# EAGLE board MovuinoHealthBandV0.2.5-panel (EAGLE 9.5.2)
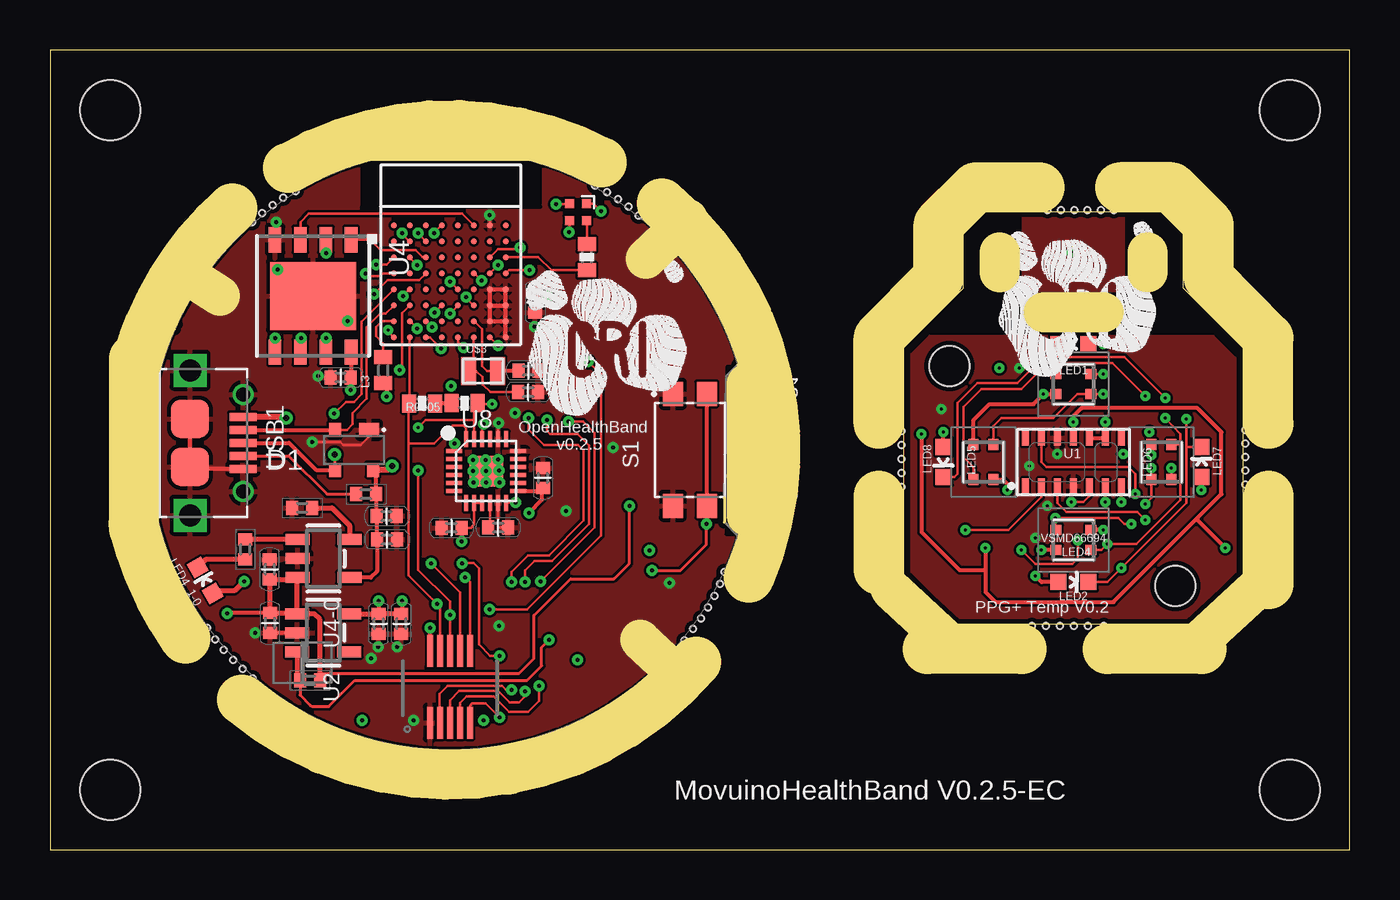
[diagram p0: board, top side]
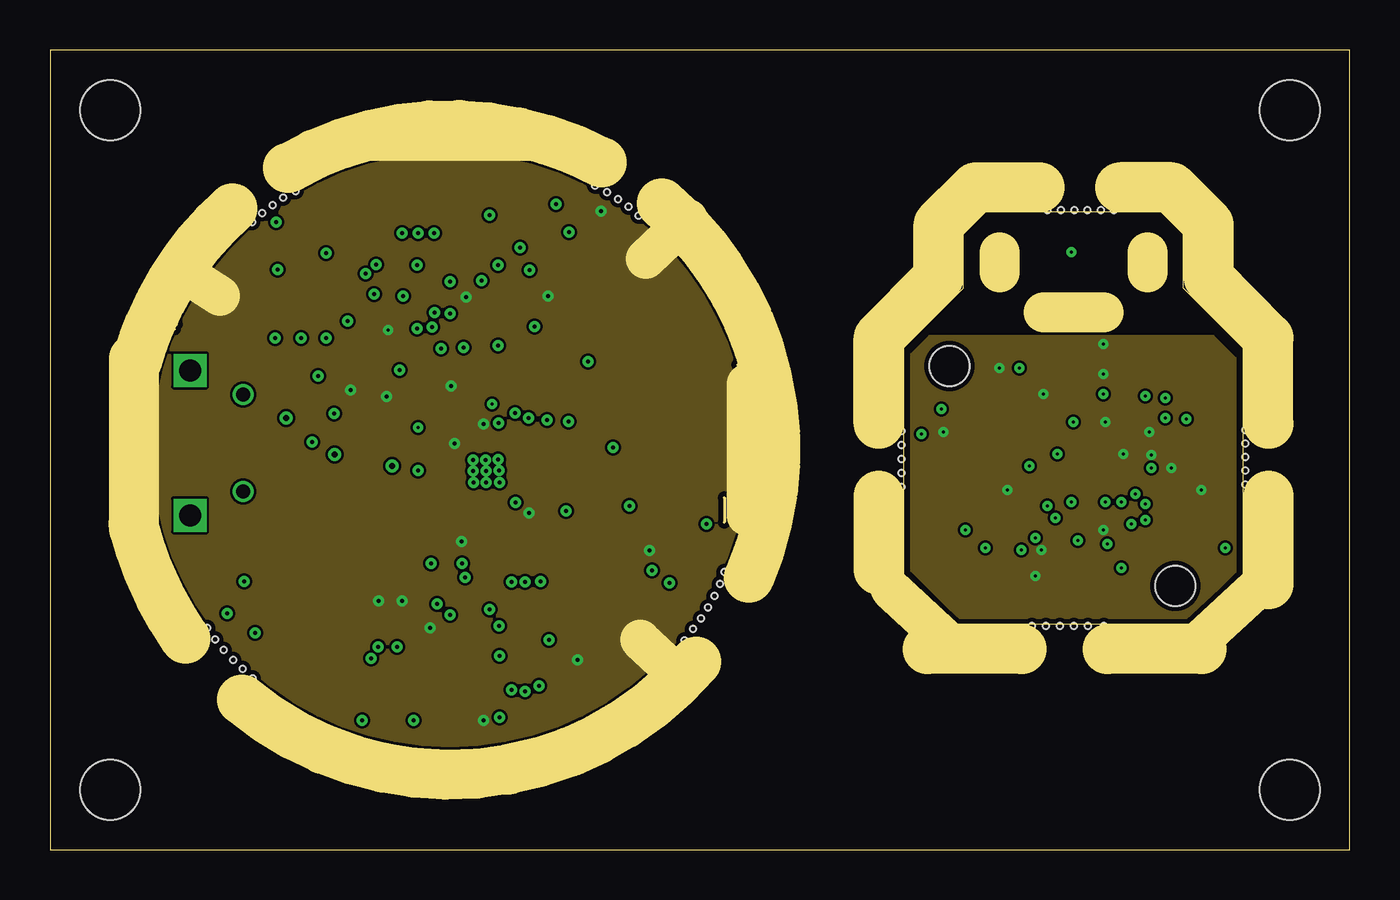
[diagram p1: board, inner layer VCC]
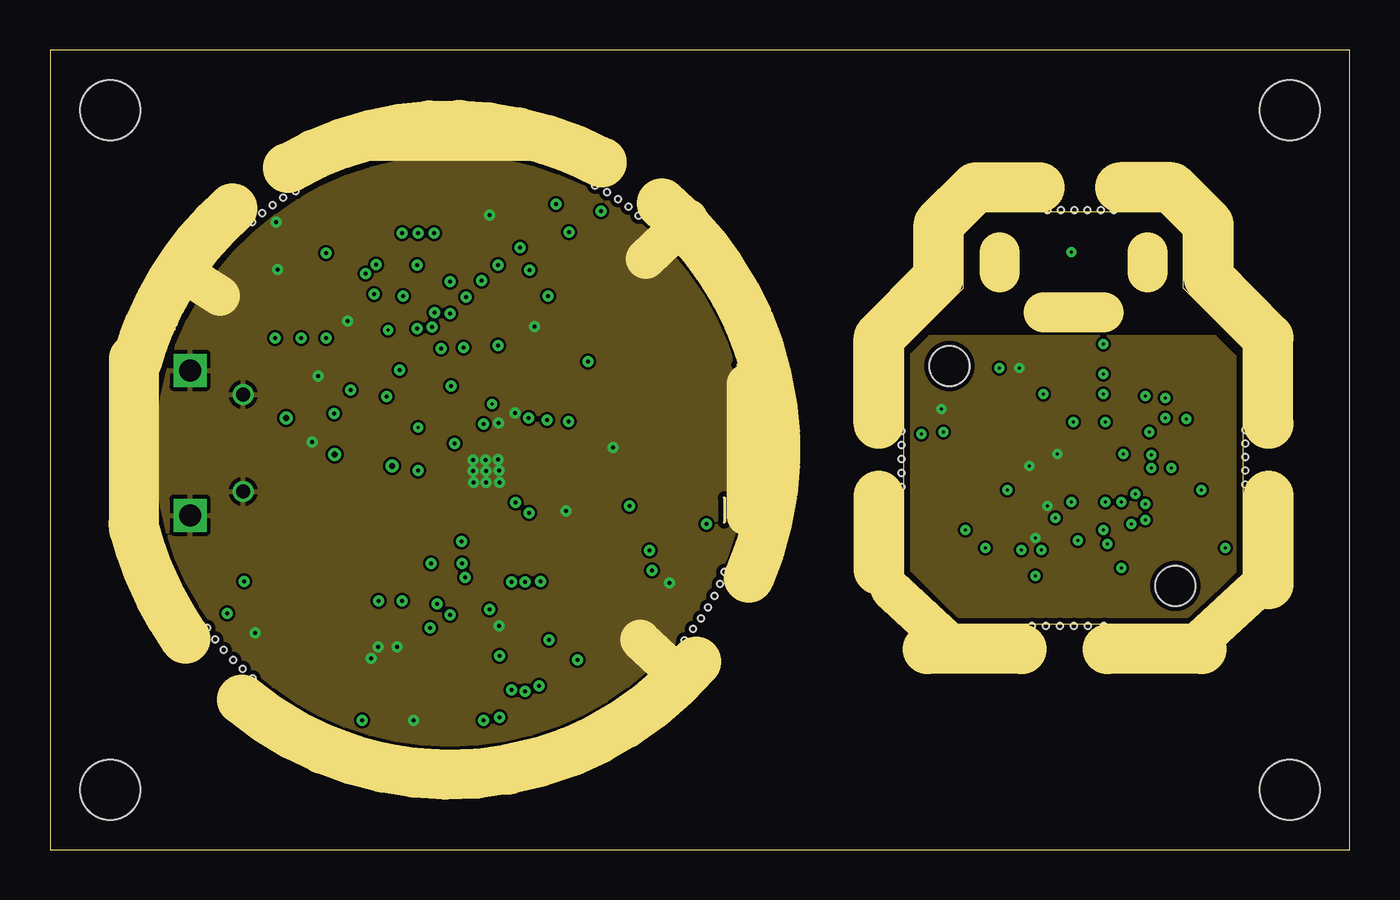
[diagram p2: board, inner layer GND2-EC]
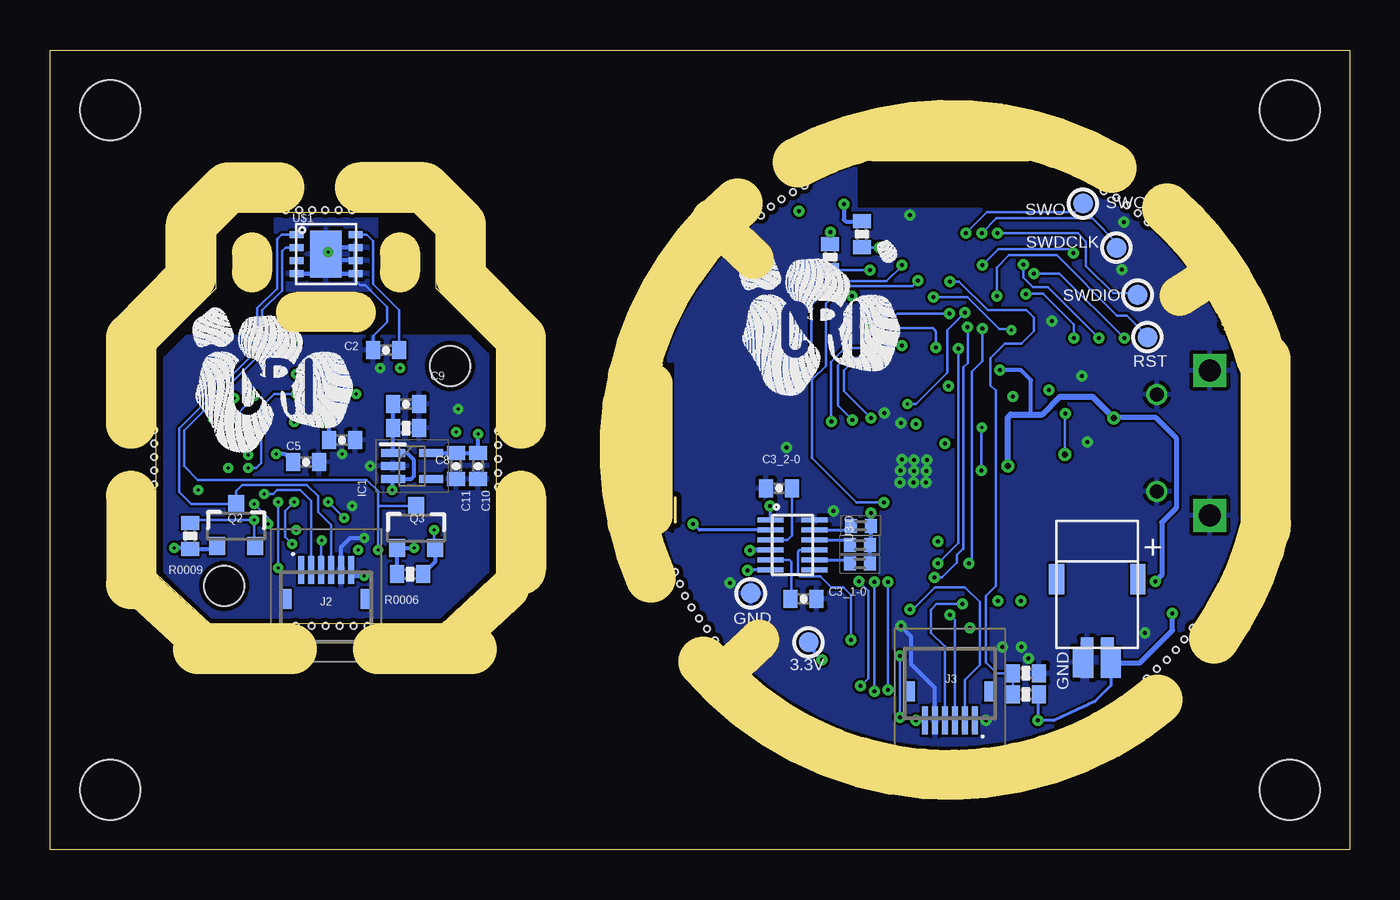
[diagram p3: board, bottom side, seen from below]

Size 65 x 40 mm. Coordinates in mm from the lower left corner, seen from the top.
Outline: 6.25,26.03 6.22,26.06
Outline: 6.33,26.25 6.36,26.28
Outline: 33.73,17.61 33.73,16.38
Outline: 34.39,24.24 34.39,24.25
Outline: 0,0 65,0 65,40 0,40 0,0
Outline: 55.59,31.88 46.79,31.88 45.69,30.78 45.69,28.08 42.69,25.08 42.69,13.78 45.39,11.28 56.99,11.28 59.69,13.78 59.69,25.08 56.69,28.08 56.69,30.78 55.59,31.88
Copper layers (1+2*3+16): Top 0.018mm / dielectric 0.36mm / VCC 0.035mm / dielectric 0.71mm / GND2-EC 0.035mm / dielectric 0.36mm / Bottom 0.018mm
Design rules "eC_4Layer_PClass7_BaseCopperO18-I35 *": minimum track width 0.125mm, minimum drill 0.15mm, track to track 0.125mm, track to pad 0.125mm, pad to pad 0.125mm, via to via 0.125mm, smd to smd 0mil, copper to edge 0.25mm, drill to drill 0.35mm, minimum pad ring 0.175mm, minimum via ring 0.175mm, stop-mask expansion 0mil, vias tented up to drill 0.45mm, thermal gap 0.2mm
Net classes: 1 power: width 0.254 mm; 2 pcbway_cheap: width 0.152 mm, drill 0.3 mm, clearance 0.152 mm; 3 pcbway_5mil: width 0.127 mm, drill 0.25 mm, clearance 0.127 mm; 4 pcbway_4mil: width 0.102 mm, drill 0.2 mm, clearance 0.102 mm; 5 Eurocircuits-Classe7-drill0.15: width 0.125 mm, drill 0.15 mm, clearance 0.125 mm
Holes 2 mm at 44.99,24.18 56.29,13.18
Holes 0.3 mm at 10.1,31.39 10.6,31.85 11.13,32.24 11.67,32.61 12.28,32.93 7.85,11.08 8.26,10.51 8.69,10 9.15,9.5 9.63,9.03 10.13,8.57 31.74,10.47 32.15,11.03 32.55,11.57 32.91,12.12 33.23,12.69 33.5,13.29 33.74,13.9 27.27,33.21 27.85,32.89 28.41,32.55 28.94,32.17 29.44,31.72 30.4,30.9 53.2,31.98 52.55,31.98 51.88,31.98 51.23,31.98 50.56,31.98 49.88,31.98 59.79,20.98 59.79,20.31 59.79,19.63 59.79,18.97 59.79,18.26 52.71,11.18 51.91,11.18 51.21,11.18 50.51,11.18 49.81,11.18 49.11,11.18 42.59,20.93 42.59,20.23 42.59,19.53 42.59,18.83 42.59,18.13
Holes 3 mm at 3,37 62,37 62,3 3,3
tRestrict: area 15.6,32.2 to 24.5,35.8; area 3.8,16.7 to 5.5,24; area 33.8,16.8 to 35.6,24.2; area 33.8,15.8 to 35.5,23.1
bRestrict: area 15.6,32.2 to 24.5,35.8; area 3.8,16.7 to 5.5,24; area 33.9,15.9 to 35.6,24.3
Milling: 31 lines

## Footprints (pad centres in the part's own frame; a part is rotated, then mirrored left to right if it is on the bottom)
TESTPOINT_ROUND_1MM = smd 1 x 1: P$1 0,0
0402-CAP = smd 0.7 x 0.9: 1 -0.65,0; 2 0.65,0
0402-CAP-SMALL-TDOCU = smd 0.6 x 0.7: 1 -0.5,0; 2 0.5,0
0402-RES = smd 0.7 x 0.9: 1 -0.65,0; 2 0.65,0
SOT143B = smd 1 x 0.7: 1 -0.75,-1 | smd 0.6 x 0.7: 2 0.95,-1; 3 0.95,1; 4 -0.95,1
SOT65P210X110-5N = smd 1.2 x 0.4: 1 -0.95,0.65; 2 -0.95,0; 3 -0.95,-0.65; 4 0.95,-0.65; 5 0.95,0.65
DF12-10-DP = smd 0.3 x 1.6: 1 -1,-1.8; 2 -1,1.8; 3 -0.5,-1.8; 4 -0.5,1.8; 5 0,-1.8; 6 0,1.8; 7 0.5,-1.8; 8 0.5,1.8; 9 1,-1.8; 10 1,1.8
59453061110EDHLF = smd 0.3 x 1.4: 1 -1.25,0.1; 2 -0.75,0.1; 3 -0.25,0.1; 4 0.25,0.1; 5 0.75,0.1; 6 1.25,0.1 | smd 0.52 x 1: MP1 -1.99,-1.35; MP2 1.99,-1.35
C0402 = smd 0.7 x 0.9: 1 -0.65,0; 2 0.65,0
VSMD66694 = smd 0.55 x 0.5: 1 -0.875,0.5; 2 -0.875,-0.5; 3 0.875,-0.5; 4 0.875,0.5
LED-0603 = smd 0.8 x 0.8: A 0,-0.75; C 0,0.75
PWR2P_1.0 = smd 2.032 x 0.635: + 0.508,0.508; - 0.508,-0.508 | smd 1.524 x 0.762: P$3 -3.429,2.032; P$4 -3.429,-2.032
SOT23-3 = smd 0.8 x 0.9: 1 -0.95,-1; 2 0.95,-1; 3 0,1.1
R0402-SMALL-TDOCU = smd 0.6 x 0.7: 1 -0.5,0; 2 0.5,0
434331045822 = smd 1.2 x 1: 1 2.8,0.85; 2 2.8,-0.85; 3 -2.8,0.85; 4 -2.8,-0.85
PAD-1X1.5_NOSILK = smd 1 x 1.5: P$1 0,0
OLGA-14 = smd 0.75 x 0.35: 1 -1.2,2.4; 2 -1.2,1.6; 3 -1.2,0.8; 4 -1.2,0; 5 -1.2,-0.8; 6 -1.2,-1.6; 7 -1.2,-2.4; 8 1.2,-2.4; 9 1.2,-1.6; 10 1.2,-0.8; 11 1.2,0; 12 1.2,0.8; 13 1.2,1.6; 14 1.2,2.4
SOT23-5 = smd 0.55 x 1.2: 1 -0.95,-1.3; 2 0,-1.3; 3 0.95,-1.3; 4 0.95,1.3; 5 -0.95,1.3
BC840 = smd 0.305 x 0.305: A0 -2.79,2.816; A1 -2.79,2.003; A2 -2.79,1.216; A3 -2.79,0.403; A4 -2.79,-0.385; A5 -2.79,-1.197; A6 -2.79,-1.985; A7 -2.79,-2.798; B0 -2.002,2.816; B1 -2.002,2.003; B2 -2.002,1.216; B3 -2.002,0.403; B4 -2.002,-0.385; B5 -2.002,-1.197; B6 -2.002,-1.985; B7 -2.002,-2.798; C0 -1.189,2.816; C1 -1.189,2.003; C2 -1.189,1.216; C3 -1.189,0.403; C4 -1.189,-0.385; C5 -1.189,-1.197; C6 -1.189,-1.985; C7 -1.189,-2.798; D0 -0.402,2.816; D1 -0.402,2.003; D2 -0.402,1.216; D3 -0.402,0.403; D4 -0.402,-0.385; D5 -0.402,-1.197; D6 -0.402,-1.985; D7 -0.402,-2.798; E0 0.411,2.816; E1 0.411,2.003; E2 0.411,1.216; E3 0.411,0.403; E4 0.411,-0.385; E5 0.411,-1.197; E6 0.411,-1.985; E7 0.411,-2.798; F0 1.198,2.816; F1 1.198,2.003; F2 1.198,1.216; F3 1.198,0.403; F4 1.198,-0.385; F5 1.198,-1.197; F6 1.198,-1.985; F7 1.198,-2.798; G0 2.011,2.816; G1 2.011,2.003; G2 2.011,1.216; G3 2.011,0.403; G4 2.011,-0.385; G5 2.011,-1.197; G6 2.011,-1.985; G7 2.011,-2.798; H0 2.798,2.816; H1 2.798,2.003; H2 2.798,1.216; H3 2.798,0.403; H4 2.798,-0.385; H5 2.798,-1.197; H6 2.798,-1.985; H7 2.798,-2.798
TDFN12 = smd 0.25 x 1.3: 1 -1.25,-1.1; 2 -0.75,-1.1; 3 -0.25,-1.1; 4 0.25,-1.1; 5 0.75,-1.1; 6 1.25,-1.1; 7 1.25,1.1; 8 0.75,1.1; 9 0.25,1.1; 10 -0.25,1.1; 11 -0.75,1.1; 12 -1.25,1.1
WSON8 = smd 0.635 x 1.27: 1 -1.905,-2.81; 2 -0.635,-2.81; 3 0.635,-2.81; 4 1.905,-2.81; 5 1.905,2.81; 6 0.635,2.81; 7 -0.635,2.81; 8 -1.905,2.81 | smd 4.3 x 3.4: 9 0,0
LEAD-QFN24 = smd 0.8 x 0.2: 1 -1.6,1; 2 -1.6,0.6; 3 -1.6,0.2; 4 -1.6,-0.2; 5 -1.6,-0.6; 6 -1.6,-1; 13 1.6,-1; 14 1.6,-0.6; 15 1.6,-0.2; 16 1.6,0.2; 17 1.6,0.6; 18 1.6,1 | smd 0.2 x 0.8: 7 -1,-1.6; 8 -0.6,-1.6; 9 -0.2,-1.6; 10 0.2,-1.6; 11 0.6,-1.6; 12 1,-1.6; 19 1,1.6; 20 0.6,1.6; 21 0.2,1.6; 22 -0.2,1.6; 23 -0.6,1.6; 24 -1,1.6 | smd 1.7 x 1.54: 25 0,0; 26 0,0
TDFN-08 = smd 0.7 x 0.35: 1 -1.475,0.975; 2 -1.475,0.325; 3 -1.475,-0.325; 4 -1.475,-0.975; 5 1.475,-0.975; 6 1.475,-0.325; 7 1.475,0.325; 8 1.475,0.975 | smd 1.58 x 2.35: EXP 0,0
CRYSTAL-SMD-2X1.2-ABS06 = smd 0.75 x 1.4: P$1 -0.725,0; P$2 0.725,0
LRTB_R48G = smd 0.45 x 0.45: 1 0.425,0.425; 2 0.425,-0.425; 3 -0.425,-0.425; 4 -0.425,0.425
MICRO-USB5+6P-SMD-0.65-AB-TB = smd 0.4 x 1.35: 1 -1.3,2.65; 2 -0.65,2.65; 3 0,2.65; 4 0.65,2.65; 5 1.3,2.65 | smd 1.9 x 1.9: P1 -1.2,0; P2 1.2,0 | drill 0.7: P5 -2.425,2.65; P6 2.425,2.65 | drill 1.1 square: P$3 -3.625,0; P$4 3.625,0

## Placement (x,y rotation side)
3.3V  [TESTPOINT_ROUND_1MM]  27.06,10.37 0 bottom
C2  1uF  [0402-CAP]  48.19,24.98 0 bottom
C2_1  10uF  [0402-CAP-SMALL-TDOCU]  11.01,11.33 270 top
C2_2  10uF  [0402-CAP-SMALL-TDOCU]  17.57,11.3 270 top
C2_3  1uF  [0402-CAP-SMALL-TDOCU]  16.44,11.3 270 top
C2_4  10uF  [0402-CAP-SMALL-TDOCU]  16.85,15.51 0 top
C3_1-0  470nF  [0402-CAP]  27.31,12.54 0 bottom
C3_2-0  1uF  [0402-CAP]  28.53,18.07 180 bottom
C4_1  10uF  [0402-CAP-SMALL-TDOCU]  10.99,14.02 270 top
C5  1uF  [0402-CAP]  52.19,19.38 0 bottom
C6  1uF  [0402-CAP]  50.39,20.48 180 bottom
C6_1  0.1uF  [0402-CAP-SMALL-TDOCU]  14.54,23.62 180 top
C6_2  0.1uF  [0402-CAP-SMALL-TDOCU]  16.84,16.68 0 top
C6_3  12pF  [0402-CAP-SMALL-TDOCU]  23.93,23.96 0 top
C6_4  12pF  [0402-CAP-SMALL-TDOCU]  23.92,22.88 0 top
C6_5  10uF  [0402-CAP-SMALL-TDOCU]  24.27,27.37 90 top
C8  10uF  [0402-RES]  47.19,21.08 180 bottom
C8_1  0.1uF  [0402-CAP-SMALL-TDOCU]  24.66,18.59 90 top
C8_2  0.1uF  [0402-CAP-SMALL-TDOCU]  22.42,16.11 0 top
C8_3  0.01uF  [0402-CAP-SMALL-TDOCU]  20.08,16.1 180 top
C9  0.1uF  [0402-CAP]  47.19,22.28 0 bottom
C10  0.1uF  [0402-CAP]  43.59,19.18 270 bottom
C11  4.7uF  [0402-CAP]  44.69,19.18 270 bottom
D1  PRTR5V0U2X,215  [SOT143B]  15.2,20 180 top
GND2  [TESTPOINT_ROUND_1MM]  29.95,12.82 0 bottom
IC1  TLV70018DCKR  [SOT65P210X110-5N]  46.89,19.18 0 bottom
J1  DF12-10-F  [DF12-10-DP]  20,8.14 0 top
J2  59453-061110EDHLF  [59453061110EDHLF]  51.19,13.88 0 bottom
J3  59453-061110EDHLF  [59453061110EDHLF]  20,6.56 180 bottom
L3  10uH  [C0402]  16.67,23.98 90 top
LED1  VSMD66694  [VSMD66694]  51.19,23.28 0 top
LED2  VSMD66694  [VSMD66694]  51.19,15.48 180 top
LED3  [LED-0603]  51.19,25.28 90 top
LED4  [LED-0603]  51.19,13.38 270 top
LED4_1-0  Power  [LED-0603]  7.76,13.46 30 top
LED5  VSMD66694  [VSMD66694]  46.69,19.38 90 top
LED6  VSMD66694  [VSMD66694]  55.59,19.38 270 top
LED7  [LED-0603]  57.59,19.38 0 top
LED8  [LED-0603]  44.69,19.38 180 top
PWR1  PWR2P_1.0  [PWR2P_1.0]  12.62,10.1 270 bottom
Q2  200mA/50V  [SOT23-3]  55.69,16.18 0 bottom
Q3  200mA/50V  [SOT23-3]  46.69,16.08 0 bottom
R0001  10K  [0402-RES]  26.85,29.63 90 top
R0002  10K  [0402-RES]  25.98,29.63 90 bottom
R2_1  100K  [R0402-SMALL-TDOCU]  15.8,17.78 180 top
R2_2  100K  [R0402-SMALL-TDOCU]  13,8.46 0 top
R0003  10K  [0402-RES]  24.39,30.78 90 bottom
R3_2-0  10KR  [R0402-SMALL-TDOCU]  24.45,16.2 0 bottom
R3_3-0  10KR  [R0402-SMALL-TDOCU]  24.49,14.31 0 bottom
R3_10  10KR  [R0402-SMALL-TDOCU]  24.49,15.23 0 bottom
R0004  10K  [0402-RES]  18.62,22.32 0 top
R4-1-0  5KR  [R0402-SMALL-TDOCU]  12.61,17.09 180 top
R4_2  100kR  [0402-RES]  16.19,7.76 180 bottom
R4_2-0  120R  [R0402-SMALL-TDOCU]  9.77,15.01 90 top
R4_3  100kR  [0402-RES]  16.18,8.82 0 bottom
R0005  10K  [0402-RES]  20.73,22.33 180 top
R0006  4.7K  [0402-RES]  46.99,13.78 0 bottom
R0009  4.7K  [0402-RES]  57.99,15.68 90 bottom
RESET  [TESTPOINT_ROUND_1MM]  10.11,25.63 0 bottom
S1  [434331045822]  32,20 90 top
SWCLK  [TESTPOINT_ROUND_1MM]  11.66,30.11 0 bottom
SWIO  [TESTPOINT_ROUND_1MM]  10.6,27.75 0 bottom
SWO  [TESTPOINT_ROUND_1MM]  13.33,32.32 0 bottom
TP3  [PAD-1X1.5_NOSILK]  13.33,9.37 180 bottom
TP4  [PAD-1X1.5_NOSILK]  11.93,9.33 180 bottom
U1  MAX30105  [OLGA-14]  51.19,19.38 90 top
U2  AP2112-3.3  [SOT23-5]  13.67,10.85 270 top
U3  [BC840]  20,28.42 0 top
U3-0  STM6601  [TDFN12]  27.86,15.23 270 bottom
U4  W25Q16BVZP  [WSON8]  13.16,27.7 180 top
U4-0  MCP73831  [SOT23-5]  13.68,14.56 270 top
U8  [LEAD-QFN24]  21.82,18.93 0 top
U$1  MAX30205MTA+  [TDFN-08]  51.19,29.78 0 bottom
U$2  LOGO-CRI-NEW-110MM-BOTTOM-SILK  [LOGO_CRI-NEW-BMP10MM-BOTTOM]  26.32,26.23 0 top
U$3  32.768khz  [CRYSTAL-SMD-2X1.2-ABS06]  21.66,23.95 0 top
U$4  LOGO-CRI-NEW-110MM-BOTTOM-SILK  [LOGO_CRI-NEW-BMP10MM-BOTTOM]  51.49,27.18 0 bottom
U$5  LOGO-CRI-NEW-110MM-BOTTOM-SILK  [LOGO_CRI-NEW-BMP10MM-BOTTOM]  53.69,23.38 0 top
U$6  LOGO-CRI-NEW-110MM-BOTTOM-SILK  [LOGO_CRI-NEW-BMP10MM-BOTTOM]  28,25.23 0 bottom
U$24  LRTB_R48G  [LRTB_R48G]  26.4,31.89 0 top
USB1  [MICRO-USB5+6P-SMD-0.65-AB-TB]  7,20.34 270 top

## Library data of the parts
3.3V GND2 J2 J3 LED3 LED4 LED7 LED8 RESET SWCLK SWIO SWO TP3 TP4 U3-0 U4 U$3 USB1 = movuino
C2 C3_1-0 C3_2-0 C5 C6 = movuino; DIELECTRIC: MLCC, X5R; MF: Murata Electronics; MPN: GRM155R61A105KE15D; OC_MOUSER: 81-GRM155R61A105KE15; OC_RS: 7235199; TOLERANCE: 10%; VOLTAGE: 10V
C2_1-C2_4 C4_1 C6_1-C6_5 C8_1-C8_3 R2_1 R2_2 R3_2-0 R3_3-0 R3_10 R4-1-0 R4_2-0 = movuinoV0
C8 = movuino; MF: Murata Electronics; OC_MOUSER: 81-GRM155R60J106ME4D; OC_RS: 8467274; TOLERANCE: 20%; VOLTAGE: 6.3V
C9-C11 = movuino; DIELECTRIC: MLCC, X5R; MF: Murata Electronics; MPN: GRM155R61C104KA88D; OC_MOUSER: 81-GRM155R61C104KA8D; OC_RS: 7235200; TOLERANCE: 10%; VOLTAGE: 16V
D1 = movuino; AVAILABILITY: Unavailable; DESCRIPTION: PRTR5V0U2X Series 9 V 16 pF Rail-to-Rail ESD Protection Diode - SOT-143B; MF: Nexperia USA; MP: PRTR5V0U2X,215; PACKAGE: SOT-143 NXP Semiconductors; PRICE: None
IC1 = movuino; DESCRIPTION: 200-mA, Low-IQ, Low-Dropout Regulator for Portable Devices; HEIGHT: 1.1mm; MANUFACTURER_NAME: Texas Instruments; MANUFACTURER_PART_NUMBER: TLV70018DCKR; MOUSER_PART_NUMBER: 595-TLV70018DCKR; MOUSER_PRICE-STOCK: https://www.mouser.com/Search/Refine.aspx?Keyword=595-TLV70018DCKR
J1 = movuino; MF: Hirose; MPN: DF12E(3.0)-10DP-0.5V(81); OC_MOUSER: 798-DF12E3010DP05V81
L3 = SparkFun-Passives
LED1 LED2 LED5 LED6 = movuino; DESCRIPTION: Red + IR LED 660/940nm 60deg SMD 1206; HEIGHT: 0.97mm; MANUFACTURER_NAME: Vishay; MANUFACTURER_PART_NUMBER: VSMD66694; MOUSER_PART_NUMBER: 78-VSMD66694; MOUSER_PRICE-STOCK: https://www.mouser.com/Search/Refine.aspx?Keyword=78-VSMD66694
LED4_1-0 = movuino; COLOUR: Red; FORWARD_INTENSITY: 25ma; FORWARD_VOLTAGE: 2.5V; LUMINOUS_INTENSITY: 180mcd; MF: OSRAM Opto Semiconductors; MPN: LS Q976-NR-1; OC_MOUSER: 720-LSQ976-NR-1; OC_RS: 6545420
PWR1 = movuino; MF: JST; MPN: SM02B-SRSS-TB(LFSN); OC_RS: 5151490
Q2 Q3 = SparkFun-DiscreteSemi; PROD_ID: TRANS-00830
R0001-R0004 R4_2 R4_3 R0005 = movuino; MF: TE Connectivity; MPN: CRG0402F10K; OC_MOUSER: 279-CRG0402F10K; OC_RS: 6678848; POWER_RATING: 0.063W; TOLERANCE: 1%
R0006 R0009 = movuino; MF: TE Connectivity; MPN: CRG0402F4K7; OC_MOUSER: 279-CRG0402F4K7; OC_RS: 6678794; POWER_RATING: 0.063W; TOLERANCE: 1%
S1 = Wurth_Elektronik_Electromechanic_Switch_rev17c
U1 = movuino; PROD_ID: IC-13510
U2 = microbuilder
U3 = BC840-v1-aligned
U4-0 = movuino; MF: Microchip; MPN: MCP73831T-2ACI/OT; OC_MOUSER: 579-MCP73831T-2ACIOT; OC_RS: 7386360
U8 = movuino; MF: InvenSense; MPN: MPU-9250; OC_RS: 8837942
U$1 = circuitects
U$2 U$4-U$6 = movuino_aestheticsV0
U$24 = movuino; MF: Osram Opto Semiconductors; MPN: LRTBR48G; OC_MOUSER: 720-LRTBR48G; OC_RS: 8769299

## Nets
1.8V [Eurocircuits-Classe7-drill0.15]: C6.2 C10.1 C11.1 IC1.5 Q2.1 Q3.1 R0006.1 R0009.1 U1.11
3.3V [Eurocircuits-Classe7-drill0.15]: 3.3V.P$1 C2_2.1 C2_3.1 C6_1.1 C6_5.2 C8_1.1 C8_3.1 J1.2 J3.6 L3.1 R3_2-0.2 R3_3-0.2 R3_10.2 U2.5 U3-0.4 U3.A7 U3.F5 U4.8 U8.1 U8.8 U8.9 U8.13 U8.22 U$24.1
3.3V1 [Eurocircuits-Classe7-drill0.15]: C5.1 C8.2 C9.1 IC1.1 IC1.3 J2.6 LED1.2 LED1.4 LED2.2 LED2.4 LED3.A LED4.A LED5.2 LED5.4 LED6.2 LED6.4 LED7.A LED8.A U1.9 U1.10
3V [Eurocircuits-Classe7-drill0.15]: R0004.2 R0005.2
3V3 [Eurocircuits-Classe7-drill0.15]: C2.2 U$1.8
!INT! [Eurocircuits-Classe7-drill0.15]: R3_2-0.1 U3-0.11
!PB! [Eurocircuits-Classe7-drill0.15]: S1.2 S1.4 U3-0.2 U3-0.6
!PB!_OUT [Eurocircuits-Classe7-drill0.15]: R3_3-0.1 U3-0.8
A0 [Eurocircuits-Classe7-drill0.15]: J1.5 U3.E7
A1 [Eurocircuits-Classe7-drill0.15]: J1.3 U3.G7
A2 [Eurocircuits-Classe7-drill0.15]: U3.G1
A3 [Eurocircuits-Classe7-drill0.15]: U3.H1
A4 [Eurocircuits-Classe7-drill0.15]: U3.F4
A5 [Eurocircuits-Classe7-drill0.15]: U3.H0
A7 [Eurocircuits-Classe7-drill0.15]: J1.7 U3.E5
B [Eurocircuits-Classe7-drill0.15]: R0003.2 U$24.4
BATT_MONITOR [Eurocircuits-Classe7-drill0.15]: R4_2.2 R4_3.1 U3.E4
BLUE_LED [Eurocircuits-Classe7-drill0.15]: R0003.1 U3.G2
CSRD [Eurocircuits-Classe7-drill0.15]: C3_1-0.1 U3-0.5
D5 [Eurocircuits-Classe7-drill0.15]: U3.C5
D6 [Eurocircuits-Classe7-drill0.15]: J1.8 U3.B6
D9 [Eurocircuits-Classe7-drill0.15]: U3.E6
D12 [Eurocircuits-Classe7-drill0.15]: J1.9 U3.C7
D13 [Eurocircuits-Classe7-drill0.15]: J1.10 U3.C6
EN [Eurocircuits-Classe7-drill0.15]: R2_2.1 U2.3 U3-0.9
G [Eurocircuits-Classe7-drill0.15]: R0002.2 U$24.3
G_DRV [Eurocircuits-Classe7-drill0.15]: LED3.C LED4.C LED7.C LED8.C U1.7
GND [Eurocircuits-Classe7-drill0.15]: C2_1.2 C2_2.2 C2_3.2 C2_4.2 C3_1-0.2 C3_2-0.2 C4_1.1 C6_1.2 C6_2.2 C6_3.2 C6_4.2 C6_5.1 C8_1.2 C8_2.2 C8_3.2 D1.1 GND2.P$1 J1.1 J3.5 PWR1.- R4-1-0.2 R4_3.2 S1.1 S1.3 TP3.P$1 U2.2 U3-0.12 U3.G0 U3.G4 U3.G5 U3.G6 U3.H4 U3.H5 U3.H6 U3.H7 U4-0.2 U4.4 U4.9 U8.11 U8.18 U8.20 U8.25 USB1.5 USB1.P1 USB1.P2 USB1.P5 USB1.P6 USB1.P$3 USB1.P$4
GND1 [Eurocircuits-Classe7-drill0.15]: C2.1 C5.2 C6.1 C8.1 C9.2 C10.2 C11.2 IC1.2 J2.5 U1.4 U1.12 U$1.4 U$1.5 U$1.6 U$1.7 U$1.EXP
GREEN_LED [Eurocircuits-Classe7-drill0.15]: R0002.1 U3.H3
INT_MPU [Eurocircuits-Classe7-drill0.15]: U3.F3 U8.12
INT_PPG [Eurocircuits-Classe7-drill0.15]: J3.2 U3.G3
INT_PPG1 [Eurocircuits-Classe7-drill0.15]: J2.2 U1.13
IR_DRV [Eurocircuits-Classe7-drill0.15]: LED1.1 LED2.1 LED5.1 LED6.1 U1.6
LV_SCL [Eurocircuits-Classe7-drill0.15]: Q3.2 R0006.2 U1.2
LV_SDA [Eurocircuits-Classe7-drill0.15]: Q2.2 R0009.2 U1.3
MISO [Eurocircuits-Classe7-drill0.15]: U3.B3
MOSI [Eurocircuits-Classe7-drill0.15]: U3.D4
N$2 [Eurocircuits-Classe7-drill0.15]: R4_2-0.2 U4-0.1
N$3 [Eurocircuits-Classe7-drill0.15]: R2_1.2 USB1.4
N$4 [Eurocircuits-Classe7-drill0.15]: C6_3.1 U3.F6 U$3.P$2
N$6 [Eurocircuits-Classe7-drill0.15]: C6_4.1 U3.F7 U$3.P$1
N$7 [Eurocircuits-Classe7-drill0.15]: R3_10.1 U3-0.10
N$8 [Eurocircuits-Classe7-drill0.15]: LED4_1-0.C R4_2-0.1
N$10 [Eurocircuits-Classe7-drill0.15]: R4-1-0.1 U4-0.5
N$17 [Eurocircuits-Classe7-drill0.15]: L3.2 U3.A6
N$23 [Eurocircuits-Classe7-drill0.15]: U3.C0
N$28 [Eurocircuits-Classe7-drill0.15]: C8_2.1 U8.10
QSPI_CS [Eurocircuits-Classe7-drill0.15]: U3.C2 U4.1
QSPI_DATA0 [Eurocircuits-Classe7-drill0.15]: U3.A3 U4.5
QSPI_DATA1 [Eurocircuits-Classe7-drill0.15]: U3.B2 U4.2
QSPI_DATA2 [Eurocircuits-Classe7-drill0.15]: U3.F0 U4.3
QSPI_DATA3 [Eurocircuits-Classe7-drill0.15]: U3.C3 U4.7
QSPI_SCK [Eurocircuits-Classe7-drill0.15]: U3.A2 U4.6
R [Eurocircuits-Classe7-drill0.15]: R0001.2 U$24.2
R_DRV [Eurocircuits-Classe7-drill0.15]: LED1.3 LED2.3 LED5.3 LED6.3 U1.5
RED_LED [Eurocircuits-Classe7-drill0.15]: R0001.1 U3.H2
RESET [Eurocircuits-Classe7-drill0.15]: RESET.P$1 U3.B4
RXD [Eurocircuits-Classe7-drill0.15]: U3.F1
SCK [Eurocircuits-Classe7-drill0.15]: U3.C4
SCL [Eurocircuits-Classe7-drill0.15]: J1.6 J3.3 R0005.1 U3.D5 U8.23
SCL1 [Eurocircuits-Classe7-drill0.15]: J2.3 Q3.3 U$1.2
SDA [Eurocircuits-Classe7-drill0.15]: J1.4 J3.4 R0004.1 U3.B7 U8.24
SDA1 [Eurocircuits-Classe7-drill0.15]: J2.4 Q2.3 U$1.1
SWDCLK [Eurocircuits-Classe7-drill0.15]: SWCLK.P$1 U3.C1
SWDIO [Eurocircuits-Classe7-drill0.15]: SWIO.P$1 U3.B1
SWO [Eurocircuits-Classe7-drill0.15]: SWO.P$1 U3.D0
TXD [Eurocircuits-Classe7-drill0.15]: U3.A1
USB_D+ [Eurocircuits-Classe7-drill0.15]: D1.3 U3.A4 USB1.3
USB_D- [Eurocircuits-Classe7-drill0.15]: D1.2 U3.A5 USB1.2
VBATT [Eurocircuits-Classe7-drill0.15]: C2_1.1 C4_1.2 PWR1.+ R2_2.2 R4_2.1 TP4.P$1 U2.1 U3-0.1 U4-0.3
VBUS [Eurocircuits-Classe7-drill0.15]: C2_4.1 C6_2.1 D1.4 LED4_1-0.A R2_1.1 U3.B5 U4-0.4 USB1.1
VREF [Eurocircuits-Classe7-drill0.15]: C3_2-0.1 U3-0.3

## Tracks (layer width: path | path; a pad name or v marks a point on that pad's centre or on a via)
1.8V  (via drill 0.15 pad 0.5)
  Top 0.2: v46.79,15.08 46.79,13.98 | 46.79,13.98 46.79,12.88 47.29,12.38 53.19,12.38 57.39,16.58 | U1.11 v51.19,21.38 51.19,21.68 51.59,22.08 57.39,22.08 58.59,20.88 58.59,17.78 57.39,16.58 | v43.59,20.78 43.59,15.88 45.49,13.98 46.79,13.98 | v58.79,15.08 57.39,16.48 57.39,16.58
  Bottom 0.2: R0006.1 Q3.1 v46.79,15.08 | C6.2 51.04,21.23 v51.19,21.38 | Q2.1 56.79,15.03 R0009.1 58.04,15.08 v58.79,15.08 | IC1.5 C11.1 C10.1 v43.59,20.78
3.3V  (via drill 0.15, 0.2, 0.2 pad 0.4, 0.2 pad 0.45)
  Top 0.125: U3.A7 16.91,25.93 v16.91,25.99 | U3.F5 20.81,27.61 v20.81,27.63 | U8.9 U8.8 21.22,16.27 21.05,16.1 C8_3.1 | U$24.1 27.18,32.31 v27.55,31.94 | U8.22 21.62,21.22 v21.69,21.29
  Top 0.2: U4.8 15.07,23.64 C6_1.1 v15.04,23 | U8.13 24.5,17.93 24.62,18.05 | 24.62,18.05 C8_1.1 | U8.1 v20.22,20.31 v20.23,20.32 | v17.6,12.43 17.6,11.83 C2_2.1 | v16.44,12.43 C2_3.1 | J1.2 v19,11.09 | L3.1 16.84,23.16 v16.84,22.66 | v23.95,16.85 24.62,17.52 24.62,18.05 | C8_3.1 v20.58,15.42 | v24.9,27.7 24.44,27.7 C6_5.2
  Top 0.254: U2.5 C2_3.1 C2_2.1
  Bottom 0.125: v16.91,25.99 16.91,26.04 17.51,26.04 19.1,27.63 v20.81,27.63 | v21.69,6.46 J3.6
  Bottom 0.2: 3.3V.P$1 27.06,10.18 v26.38,9.5 | R3_3-0.2 R3_10.2 23.95,15.27 R3_2-0.2 v23.95,16.85 | U3-0.4 v29.97,14.98 v29.98,14.97
  other vias: 20.07,23.18
  pour VCC: 5.2,20 arc-90 20,34.8 arc-90 34.8,20 arc-90 20,5.2 arc-90
3.3V1  (via drill 0.15 pad 0.5)
  Top 0.125: LED6.4 v56.09,19.08 | LED1.4 v52.69,23.78 | LED3.A v52.69,25.28
  Top 0.2: v52.79,21.38 U1.9 U1.10 | LED8.A v44.69,20.88 | LED4.A 49.59,13.38 v49.29,13.68 | LED2.4 v49.59,14.98 | v52.69,15.98 LED2.2 | LED1.2 v49.69,22.78 49.19,22.28 46.99,22.28 46.19,21.48 LED5.4 | LED6.2 v55.09,19.73 | LED7.A v57.59,17.98 | LED5.2 47.66,18.5 47.89,18.28 v47.89,17.98
  Bottom 0.2: C9.1 C8.2 IC1.1 47.14,19.83 46.79,19.48 46.79,18.68 46.94,18.53 IC1.3 47.89,18.48 v47.89,17.98 | J2.6 49.94,13.68 v49.29,13.68 | C5.1 53.24,19.78 v53.69,19.78
  other vias: 54.99,20.88 47.49,24.08
  pour VCC: 43.09,24.78 43.99,25.68 58.19,25.68 59.29,24.58 59.29,13.88 56.99,11.58 45.44,11.58 43.09,13.93
3V
  Top 0.2: R0004.2 R0005.2
3V3
  Bottom 0.125: U$1.8 49.16,30.76 48.84,30.43 48.84,28.28 47.54,26.98 C2.2
!INT!
  Bottom 0.152: U3-0.11 25.17,15.98 R3_2-0.1
!PB!  (via drill 0.2 pad 0.4)
  Top 0.15: v30.12,13.96 31.53,13.96 32.83,15.26 v32.83,16.29
  Top 0.2: v32.83,16.29 32.83,17.18 S1.4 S1.2
  Bottom 0.152: U3-0.6 30.1,13.98 v30.12,13.96 | U3-0.2 32.52,15.98 v32.83,16.29
!PB!_OUT
  Bottom 0.152: U3-0.8 25.16,14.48 R3_3-0.1
A0  (via drill 0.2 pad 0.4, 0.2 pad 0.45)
  Top 0.125: v23.77,13.39 23.77,13.97 24.24,14.44 25.1,14.44 26.96,16.3 26.96,20.22 26.38,20.8 25,20.8 24.86,20.94 v24.86,21.48 | v20.68,25.12 20.41,25.39 U3.E7 | J1.5 20,7.47 20.47,7.94 22.4,7.94 22.98,7.36 23.47,7.36 23.77,7.66 v23.77,7.91
  Bottom 0.125: v20.68,25.12 20.68,25.91 20.85,26.08 22.91,26.08 24.39,24.6 25.21,24.6 25.6,24.21 25.6,22.22 v24.86,21.48 | v23.77,7.91 v23.77,13.39
A1  (via drill 0.2 pad 0.4, 0.2 pad 0.45)
  Top 0.125: v23.09,13.38 23.09,13.9 23.91,14.72 24.95,14.72 26.69,16.46 26.69,19.96 26.41,20.24 24.7,20.24 23.93,21.01 v23.93,21.58 | J1.3 19.49,7.8 19.88,8.19 22.61,8.19 22.82,7.98 v23.09,7.98 | U3.G7 22.4,25.23 v22.4,25.21
  Bottom 0.125: v23.93,21.58 25.28,22.93 25.28,23.97 24.9,24.35 24.07,24.35 23.21,25.21 v22.4,25.21 | v23.09,7.98 v23.09,13.38
A7  (via drill 0.2 pad 0.4, 0.2 pad 0.45)
  Top 0.125: U3.E5 v20.01,26.82 | v24.54,13.41 27.24,16.11 27.24,20.84 26.66,21.41 v25.93,21.41 | J1.7 20.5,7.33 20.83,7.66 22.19,7.66 22.95,6.9 23.91,6.9 24.46,7.45 v24.46,8.18
  Bottom 0.125: v20.01,26.82 22.62,26.82 24.35,25.09 25.23,25.09 25.93,24.39 v25.93,21.42 v25.93,21.41 | v24.46,8.18 24.07,8.57 24.07,12.94 v24.54,13.41
B  (via drill 0.2 pad 0.4)
  Top 0.125: U$24.4 25.96,32.3 v25.3,32.3
  Bottom 0.2: v25.3,32.3 25.3,31.52 25.2,31.42 R0003.2
BATT_MONITOR  (via drill 0.2 pad 0.4)
  Top 0.125: U3.E4 20.39,28.04 v20,28.42
  Bottom 0.125: v20,28.42 19.54,28.42 18.1,26.98 16.18,26.98 16.17,26.99 15.79,26.61 15.79,25.93 16.41,25.31 17.23,25.31 17.95,24.59 17.95,23.22 17.7,22.97 17.7,13.18 18.18,12.7 18.18,9.36 17.64,8.82 16.92,8.82 | 16.92,8.82 R4_3.1 | R4_2.2 16.84,8.74 16.92,8.82
BLUE_LED  (via drill 0.2 pad 0.4)
  Top 0.125: U3.G2 22.41,30.03 23.42,30.03 v23.51,30.12
  Bottom 0.125: R0003.1 v23.51,30.12
CSRD
  Bottom 0.125: C3_1-0.1 27.91,12.59 27.91,14.38 28.01,14.48 U3-0.5
D6  (via drill 0.2 pad 0.4)
  Top 0.125: J1.8 20.5,12.86 v19.05,14.31 | U3.B6 v18.37,26.07
  Bottom 0.125: v19.05,14.31 18.9,14.46 18.9,23.91 18.37,24.44 v18.37,26.07
D12  (via drill 0.2 pad 0.4, 0.2 pad 0.45)
  Top 0.125: U3.C7 19.02,25.62 v19.57,25.07 | v22.48,9.69 22.02,9.69 21.45,10.26 21.45,14.06 21.18,14.33 v20.61,14.33 v20.6,14.32 | J1.9 21,7.2 21.12,7.32 21.78,7.32 v22.48,6.62
  Bottom 0.125: v20.6,14.32 19.57,15.35 v19.57,25.07 | v22.48,9.69 v22.48,6.62
D13  (via drill 0.2 pad 0.4)
  Top 0.125: U3.C6 v19.11,26.13 | J1.10 21,13.38 v20.77,13.61
  Bottom 0.125: v20.77,13.61 20.39,13.61 19.63,14.37 19.63,14.74 19.33,15.04 19.31,15.04 19.31,24.13 19.1,24.34 19.1,26.12 v19.11,26.13
EN  (via drill 0.2 pad 0.4)
  Top 0.152: R2_2.1 12.5,7.73 13.01,7.22 13.13,7.16 13.94,7.16 15.24,8.46 23.85,8.46 24.59,9.2 24.59,10.12 v24.95,10.48
  Top 0.254: U2.3 12.37,8.59 R2_2.1
  Bottom 0.125: v24.95,10.48 24.95,12.75 25.31,13.11 25.9,13.11 25.91,13.11 26.47,13.67 27.49,13.67 27.6,13.78 27.6,14.89 27.51,14.98 U3-0.9
G  (via drill 0.2 pad 0.4)
  Top 0.125: U$24.3 v25.98,30.89 v25.97,30.89
  Bottom 0.125: R0002.2 v25.97,30.89
G_DRV  (via drill 0.15, 0.15 pad 0.5)
  Top 0.125: LED8.C 45.24,18.63 45.39,18.78 45.39,22.33 46.39,23.33 48.39,23.33 49.69,24.63 50.44,24.63 | v55.79,22.58 53.74,24.63 50.44,24.63 | LED3.C 50.44,24.63 | U1.7 v53.59,17.38 | LED4.C 52.89,13.38 v53.59,14.08 56.84,17.33 56.84,20.13 | 56.84,20.13 v56.84,21.53 | LED7.C 56.84,20.13
  Bottom 0.125: v56.84,21.53 v55.79,22.58 | v53.59,14.08 v53.59,17.38
GND  (via drill 0.2, 0.2 pad 0.4, 0.2 pad 0.45)
  Top 0.125: C8_2.2 22.49,16.11 22.41,16.19 U8.11 | U3.G0 22.01,31.71 v21.98,31.74 | U8.20 v22.42,21.34 v22.43,21.35 | D1.1 15.95,20.67 15.53,20.25 14.66,20.25 14.51,20.4 v13.12,20.4 | U8.25 v21.81,18.93 v21.8,18.94
  Top 0.2: U3.H7 U3.H6 | U3.H6 U3.H5 | U3.H5 U3.H4 U3.G4 U3.G5 | U3.G5 U3.H5 | U3.H6 U3.G6 U3.G5 | U8.25 v21.82,18.37 v21.81,18.36 | U2.2 11.03,10.85 C2_1.2 | USB1.5 7.1,19.04 USB1.P2 USB1.P1
  Bottom 0.2: J3.5 20.75,8.09 21.92,9.26 21.92,10.65 v22.45,11.18
  other vias: 11.38,29.02 11.3,31.38 23.26,21.83 24.23,26.16 16.42,10.15 17.37,10.15 13.4,23.68 21.17,18.95 25.82,16.93 30.99,13.33 21.18,18.36 22.48,18.37 22.47,18.96 21.15,19.5 21.78,19.5 22.4,19.51 16.06,9.57 10.25,10.83 18.19,6.47 28.16,20.12 14.88,26.43
  pour Top: 5.24,20.01 arc-90 20.04,34.81 arc-90 34.84,20.01 arc-90 20.04,5.21 arc-90
  pour Bottom: 5.21,20.04 arc-90 20.01,34.84 arc-90 34.81,20.04 arc-90 20.01,5.24 arc-90
  pour GND2-EC: 5.36,19.86 arc-90 20.16,34.66 arc-90 34.8,20.02 arc-90 20,5.22 arc-90
GND1  (via drill 0.15 pad 0.5)
  Bottom 0.125: C2.1 48.84,25.68 48.14,26.38 48.14,27.13 49.24,28.23 49.49,28.23 49.72,28.45 U$1.5
  Bottom 0.2: v51.09,29.88 50.86,30.11 U$1.7 U$1.6 | U$1.4 51.36,28.8 50.99,29.18 50.99,29.38 | 50.99,29.38 50.99,29.48 | 50.99,29.48 50.99,29.58 U$1.EXP | U$1.6 U$1.5 50.41,28.8 50.99,29.38 | U$1.6 49.74,29.48 50.99,29.48 | J2.5 50.44,15.13 49.99,15.58 v49.29,15.58
  other vias: 50.39,19.78 44.59,22.03 48.49,24.08 49.89,17.18 48.99,19.18
  pour Top: 43.09,24.78 43.99,25.68 58.19,25.68 59.29,24.58 59.29,13.88 56.99,11.58 45.39,11.58 43.09,13.88
  pour Bottom: 43.09,24.78 43.99,25.68 58.19,25.68 59.29,24.58 59.29,13.88 56.99,11.58 45.39,11.58 43.09,13.88
  pour Bottom: 48.69,27.98 53.69,27.98 53.69,31.68 48.69,31.68
  pour Top: 48.69,27.98 53.69,27.98 53.69,31.68 48.69,31.68
  pour GND2-EC: 43.09,24.78 43.99,25.68 58.29,25.68 59.29,24.68 59.29,13.88 57.04,11.63 45.39,11.63 43.09,13.93
GREEN_LED  (via drill 0.2 pad 0.4)
  Top 0.125: v23.99,28.98 22.96,28.98 U3.H3
  Bottom 0.125: R0002.1 v23.99,28.98
INT_MPU  (via drill 0.2 pad 0.4)
  Top 0.125: U3.F3 21.23,28.82 v21.58,28.47 | v23.29,17.37 22.86,17.37 U8.12
  Bottom 0.125: v23.29,17.37 24.66,17.37 26.88,19.59 26.88,23.52 26.2,24.2 26.2,27.31 25.33,28.18 21.87,28.18 v21.58,28.47
INT_PPG  (via drill 0.2 pad 0.4)
  Top 0.125: v21.98,12.01 23.85,12.01 27.55,15.71 27.55,23.79 v26.92,24.42 | U3.G3 22.01,28.84 v22.4,29.23
  Bottom 0.125: v22.4,29.23 22.4,29.19 23.16,28.43 25.74,28.43 26.92,27.25 v26.92,24.42 | v21.98,12.01 21.84,12.01 20.74,13.11 19.23,13.11 18.5,12.38 18.5,9.23 19.25,8.48 J3.2
INT_PPG1  (via drill 0.15 pad 0.5)
  Top 0.125: v54.29,17.78 54.29,18.78 53.94,19.13 49.84,19.13 49.59,19.38 U1.13
  Bottom 0.125: J2.2 51.94,17.43 52.49,17.98 53.64,17.98 53.84,17.78 v54.29,17.78
IR_DRV  (via drill 0.15 pad 0.5)
  Top 0.125: LED5.1 46.19,19.13 45.69,19.63 45.69,22.13 46.59,23.03 48.59,23.03 49.89,24.33 50.34,24.33 | 50.34,24.33 53.14,24.33 v54.79,22.68 | v55.79,21.58 56.54,20.78 56.54,20.28 | 56.54,20.28 56.54,17.48 54.34,15.28 v52.89,15.28 52.59,14.98 LED2.1 | U1.6 v52.79,17.38 | LED1.1 50.31,24.3 50.34,24.33 | LED6.1 56.52,20.25 56.54,20.28
  Bottom 0.125: v55.79,21.58 v54.79,22.68 | v52.89,15.28 53.24,15.63 53.24,16.93 v52.79,17.38
LV_SCL  (via drill 0.15 pad 0.5)
  Top 0.125: U1.2 49.59,17.63 47.94,15.98 v45.79,15.98
  Bottom 0.125: Q3.2 45.79,15.13 v45.79,15.98
  Bottom 0.2: Q3.2 45.74,14.38 R0006.2
LV_SDA  (via drill 0.15 pad 0.5)
  Top 0.125: v54.79,16.48 54.39,16.88 50.84,16.88 50.39,17.33 U1.3
  Bottom 0.125: Q2.2 54.79,15.23 v54.79,16.48 57.84,16.48 R0009.2
N$2
  Top 0.254: U4-0.1 R4_2-0.2
N$3
  Top 0.152: USB1.4 11.94,19.69 13.85,17.78 R2_1.2
N$4
  Top 0.125: U$3.P$2 21.87,23.95 21.62,24.2 21.62,26.03 21.21,26.43 U3.F6
  Top 0.2: C6_3.1 U$3.P$2
N$6
  Top 0.125: C6_4.1 22.03,22.88 21.64,23.27 21.64,23.63 21.32,23.95 21.13,23.95 | 21.13,23.95 U$3.P$1 | U3.F7 21.2,24.02 21.13,23.95
N$7
  Bottom 0.152: U3-0.10 25.24,15.48 R3_10.1
N$8
  Top 0.254: R4_2-0.1 7.79,14.51 LED4_1-0.C
N$10
  Top 0.254: R4-1-0.1 14.11,17.09 14.98,16.22 U4-0.5
N$17
  Top 0.125: U3.A6 16.6,26.44 16.3,26.14 16.3,25.68 16.67,25.31 L3.2
N$28
  Top 0.125: U8.10 22.02,16.21 C8_2.1
QSPI_CS
  Top 0.125: U3.C2 18.63,29.64 18.29,29.98 16.53,29.98 16,30.51 U4.1
QSPI_DATA0  (via drill 0.2 pad 0.45)
  Top 0.125: U4.5 11.26,25.57 v11.27,25.59 | v15.79,28.82 15.92,28.69 16.5,28.69 16.62,28.81 17.2,28.81 U3.A3
  Bottom 0.125: v11.27,25.59 14.5,28.82 v15.79,28.82
QSPI_DATA1  (via drill 0.2 pad 0.4)
  Top 0.125: U4.2 13.82,30.48 v13.82,29.83 | v18.37,29.24 18,29.61 U3.B2
  Bottom 0.125: v18.37,29.24 17.56,30.05 14.04,30.05 v13.82,29.83
QSPI_DATA2
  Top 0.125: U3.F0 20.62,31.81 12.94,31.81 12.53,31.39 U4.3
QSPI_DATA3  (via drill 0.2 pad 0.4, 0.2 pad 0.45)
  Top 0.125: U4.7 v13.79,25.58 v13.8,25.59 | U3.C3 18.47,28.48 16.89,28.48 v16.2,27.79
  Bottom 0.125: v16.2,27.79 16.18,27.81 15.35,27.81 13.8,26.26 v13.8,25.59
QSPI_SCK  (via drill 0.2 pad 0.4, 0.2 pad 0.45)
  Top 0.125: U3.A2 16.84,29.27 v16.32,29.27 | U4.6 12.53,25.57 v12.55,25.6
  Bottom 0.125: v12.55,25.6 15.09,28.14 15.85,28.14 16.32,28.61 v16.32,29.27
R
  Top 0.125: R0001.2 26.85,31.44 U$24.2
R_DRV  (via drill 0.15, 0.15 pad 0.5)
  Top 0.125: LED5.3 47.19,21.18 47.59,21.58 50.19,21.58 51.39,22.78 LED1.3 v52.69,22.78 | LED2.3 50.29,16 v50.29,16.58 53.44,16.58 53.74,16.28 v54.09,16.28 | U1.5 51.99,17.68 51.69,17.38 v51.09,17.38 | v54.79,17.28 55.09,17.58 LED6.3 v55.09,19.08
  Bottom 0.125: v55.09,19.08 54.69,19.08 54.44,19.33 54.44,22.13 53.79,22.78 v52.69,22.78 | v51.09,17.38 v50.29,16.58 | v54.09,16.28 54.09,16.58 v54.79,17.28
RED_LED
  Top 0.125: R0001.1 25.09,28.98 24.42,29.65 U3.H2
RESET  (via drill 0.2 pad 0.4)
  Top 0.125: U3.B4 v17.65,27.69
  Bottom 0.125: v17.65,27.69 17.65,29.11 17.03,29.73 14.64,29.73 11.63,26.72 11.13,26.72 10.11,25.7 RESET.P$1
SCL  (via drill 0.15, 0.2, 0.2 pad 0.4)
  Top 0.125: U3.D5 v19.23,26.86 | J1.6 v20,11.75 20,12.42 18.42,14 v18.42,18.97 | U8.23 21.22,21.5 | v18.4,21.11 18.79,21.5 21.22,21.5 | 21.22,21.5 21.22,22.17 R0005.1 21.43,22.28 v22.12,22.28
  Bottom 0.125: J3.3 19.75,11.5 v20,11.75 | v19.23,26.86 20.11,25.98 20.11,23.86 21.69,22.28 v22.12,22.28 | v18.42,18.97 18.42,21.09 v18.4,21.11
SCL1  (via drill 0.15 pad 0.5)
  Top 0.125: v51.41,15.46 51.41,14.55 51.14,14.28 49.29,14.28 v48.59,14.98
  Bottom 0.125: J2.3 51.44,15.43 v51.41,15.46 | v48.59,14.98 48.59,17.18 | 48.59,17.18 48.59,17.93 49.15,18.49 57.6,18.49 58.29,19.18 58.29,20.96 54.38,24.88 54.38,26.98 53.39,27.96 53.39,29.93 53.22,30.11 U$1.2 | Q3.3 48.59,17.18
SDA  (via drill 0.2 pad 0.4)
  Top 0.125: U3.B7 18,22.35 R0004.1 17.93,22.28 17.93,20.31 | J1.4 19.5,12.15 v19.36,12.29 17.93,13.72 17.93,20.31 | U8.24 20.82,21.07 20.67,21.22 20.13,21.22 19.22,20.31 17.93,20.31
  Bottom 0.125: J3.4 20.25,10.16 20.94,10.85 20.94,12 20.65,12.29 v19.36,12.29
SDA1
  Bottom 0.125: J2.4 50.94,16.23 51.59,16.88 51.59,17.68 52.15,18.24 55.39,18.24 55.69,17.94 Q2.3 57.94,17.28 58.54,17.88 58.54,21.07 54.63,24.98 54.63,27.08 53.64,28.07 53.64,30.53 53.41,30.76 U$1.1
SWDCLK  (via drill 0.2 pad 0.45)
  Top 0.125: U3.C1 v18.4,30.83 v18.4,30.84
  Bottom 0.125: v18.4,30.84 17.66,31.58 12.87,31.58 11.66,30.37 SWCLK.P$1
SWDIO  (via drill 0.2 pad 0.45)
  Top 0.125: U3.B1 17.61,30.81 v17.61,30.83
  Bottom 0.125: SWIO.P$1 10.68,27.83 11.81,27.83 13.18,29.2 13.18,30.42 13.59,30.83 v17.61,30.83
SWO  (via drill 0.2 pad 0.45)
  Top 0.125: U3.D0 19.6,31.23 v19.2,30.83
  Bottom 0.125: v19.2,30.83 18.13,31.9 13.75,31.9 SWO.P$1
USB_D+  (via drill 0.2, 0.3 pad 0.6)
  Top 0.125: U3.A4 15.59,26.41 15.59,22.78 15.2,22.39 14.8,22.39 v14.22,21.81
  Top 0.152: v14.24,19.76 D1.3
  Top 0.2: USB1.3 11.96,20.34 13.3,19 D1.3
  Bottom 0.125: v14.24,19.76 14.24,21.79 v14.22,21.81
USB_D-
  Top 0.125: U3.A5 16.8,26.81 16.52,26.81 15.84,26.13 15.84,22.56 15.13,21.85 15.13,21.28 14.85,21 D1.2
  Top 0.2: D1.2 14.2,20.95 14.16,20.99 USB1.2
VBATT  (via drill 0.2 pad 0.4, 0.2 pad 0.45)
  Top 0.152: 13.5,8.82 23.47,8.82 24.21,9.56 24.21,11.72 26.04,13.55 28.21,13.55 28.98,14.32 v28.98,17.2
  Top 0.203: C2_1.1 8.88,11.83 v8.86,11.81
  Top 0.254: U2.1 12.34,11.83 C2_1.1 10.99,11.85 C4_1.2 12.21,13.52 12.37,13.36 | U2.1 12.37,13.36 | 12.37,13.36 U4-0.3 | R2_2.2 13.5,8.82 13.5,11.51 13.21,11.8 U2.1
  Bottom 0.152: TP4.P$1 11.93,8.21 12.73,7.4 13.11,7.23 13.12,7.22 13.26,7.16 14.77,6.46 14.78,6.47 v15.6,6.47 15.6,7.7 R4_2.1 | v28.98,17.2 28.98,16.5 U3-0.1
  Bottom 0.2: TP4.P$1 11.93,9.41 PWR1.+
  Bottom 0.254: TP4.P$1 10.5,9.33 8.86,10.97 v8.86,11.81
VBUS  (via drill 0.2 pad 0.4, 0.3)
  Top 0.125: U3.B5 17.61,26.84 17.61,24.11 v17.48,23.98
  Top 0.152: 16.3,18.85 D1.4
  Top 0.2: U4-0.4 16.04,13.61 16.35,13.92 C2_4.1 C6_2.1 16.34,17.68 16.37,17.71 | R2_1.1 16.3,18.85
  Top 0.254: 16.37,17.71 R2_1.1 | v9.71,13.42 9.23,12.94 8.27,12.94 LED4_1-0.A
  Top 0.305: v11.8,21.6 11.76,21.64 USB1.1 | v17.1,19.2 16.9,19 D1.4
  Bottom 0.2: 15.98,21.77 15.93,21.82 15.93,23.48 16.43,23.98 v17.48,23.98
  Bottom 0.254: v11.8,21.6 11.78,21.62 9.69,21.62 8.67,20.6 8.67,17.1 9.4,16.37 9.4,13.73 v9.71,13.42
  Bottom 0.305: v17.1,19.2 17.1,21.61 16.94,21.77 15.98,21.77 15.37,21.77 14.48,22.66 12.86,22.66 v11.8,21.6
VREF
  Bottom 0.125: U3-0.3 28.12,15.48 27.88,15.72 C3_2-0.1

## Text on the board
tPlace: OpenHealthBand | v0.2.5 | PPG+ Temp V0.2 | MovuinoHealthBand V0.2.5-EC
bPlace: SWO | SWDCLK | SWDIO | RST | + | GND | GND | 3.3V
tNames: SCAP V0.31